# EAGLE board untitled (EAGLE 8.5.2)

No outline drawn. Coordinates in mm, seen from the top.
Copper layers (1*16): Top 0.035mm / dielectric 1.5mm / Bottom 0.035mm
Design rules "default": minimum track width 6mil, minimum drill 0.35mm, track to track 6mil, track to pad 6mil, pad to pad 6mil, via to via 6mil, smd to smd 6mil, copper to edge 40mil, drill to drill 6mil, minimum pad ring 10mil, minimum via ring 8mil, stop-mask expansion 4mil, vias tented up to drill 0mil, thermal gap 10mil

## Footprints (pad centres in the part's own frame; a part is rotated, then mirrored left to right if it is on the bottom)
L12P = drill 1.016 long: 1 13.75,-6.25; 2 11.25,-6.25; 3 8.75,-6.25; 4 6.25,-6.25; 5 3.75,-6.25; 6 1.25,-6.25; 7 -1.25,-6.25; 8 -3.75,-6.25; 9 -6.25,-6.25; 10 -8.75,-6.25; 11 -11.25,-6.25; 12 -13.75,-6.25

## Placement (x,y rotation side)
E$1  [L12P]  29.21,41.91 0 top
E$2  [L12P]  73.66,41.91 0 top

## Library data of the parts
E$1 E$2 = con-amp-mt